# Altium PCB EFR32xG22_LC_REF_DES_A01.PcbDoc
Units mil, origin at the board's own origin, x right, y up, seen from the top; angles counter-clockwise.
Board outline 1341.79 x 1165.25 mil, 2 copper layers (Top Layer, Bottom Layer), stack 30.8 mil thick; 51 components, 41 nets, 152 pads, 622 vias.
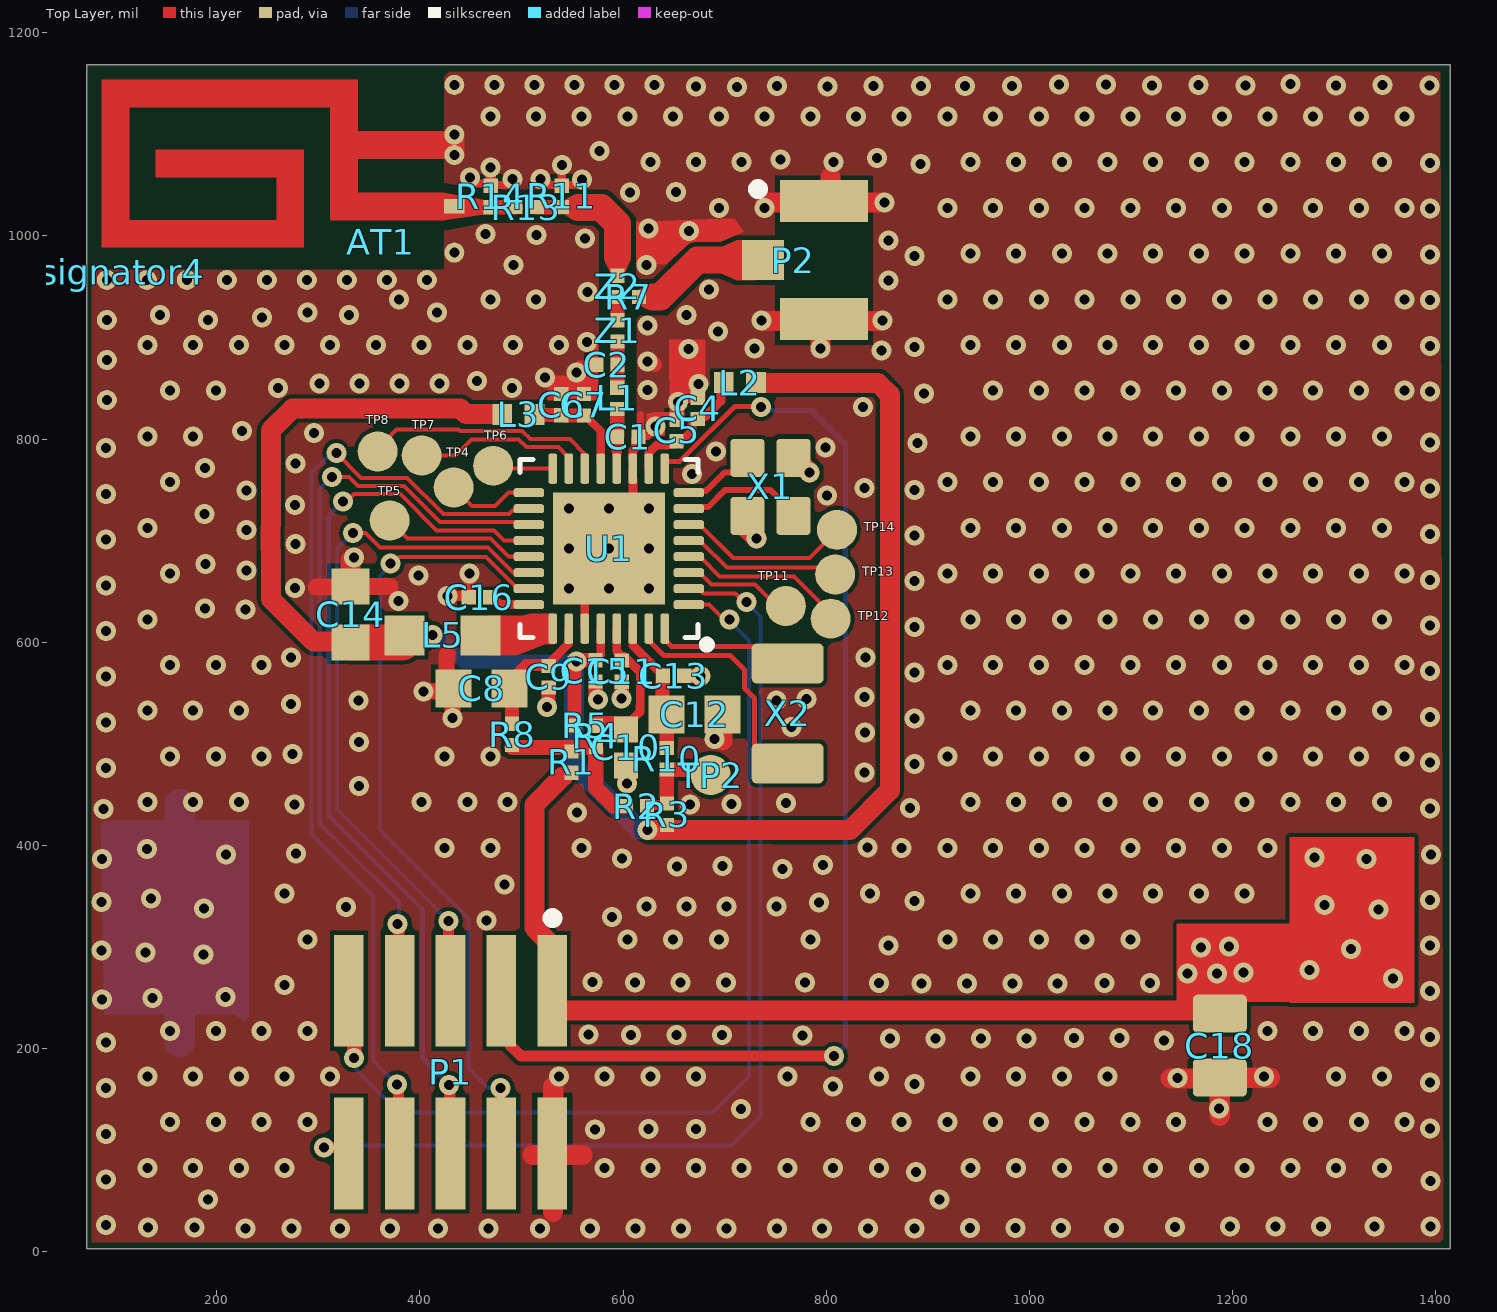
[diagram p0: Top Layer view]
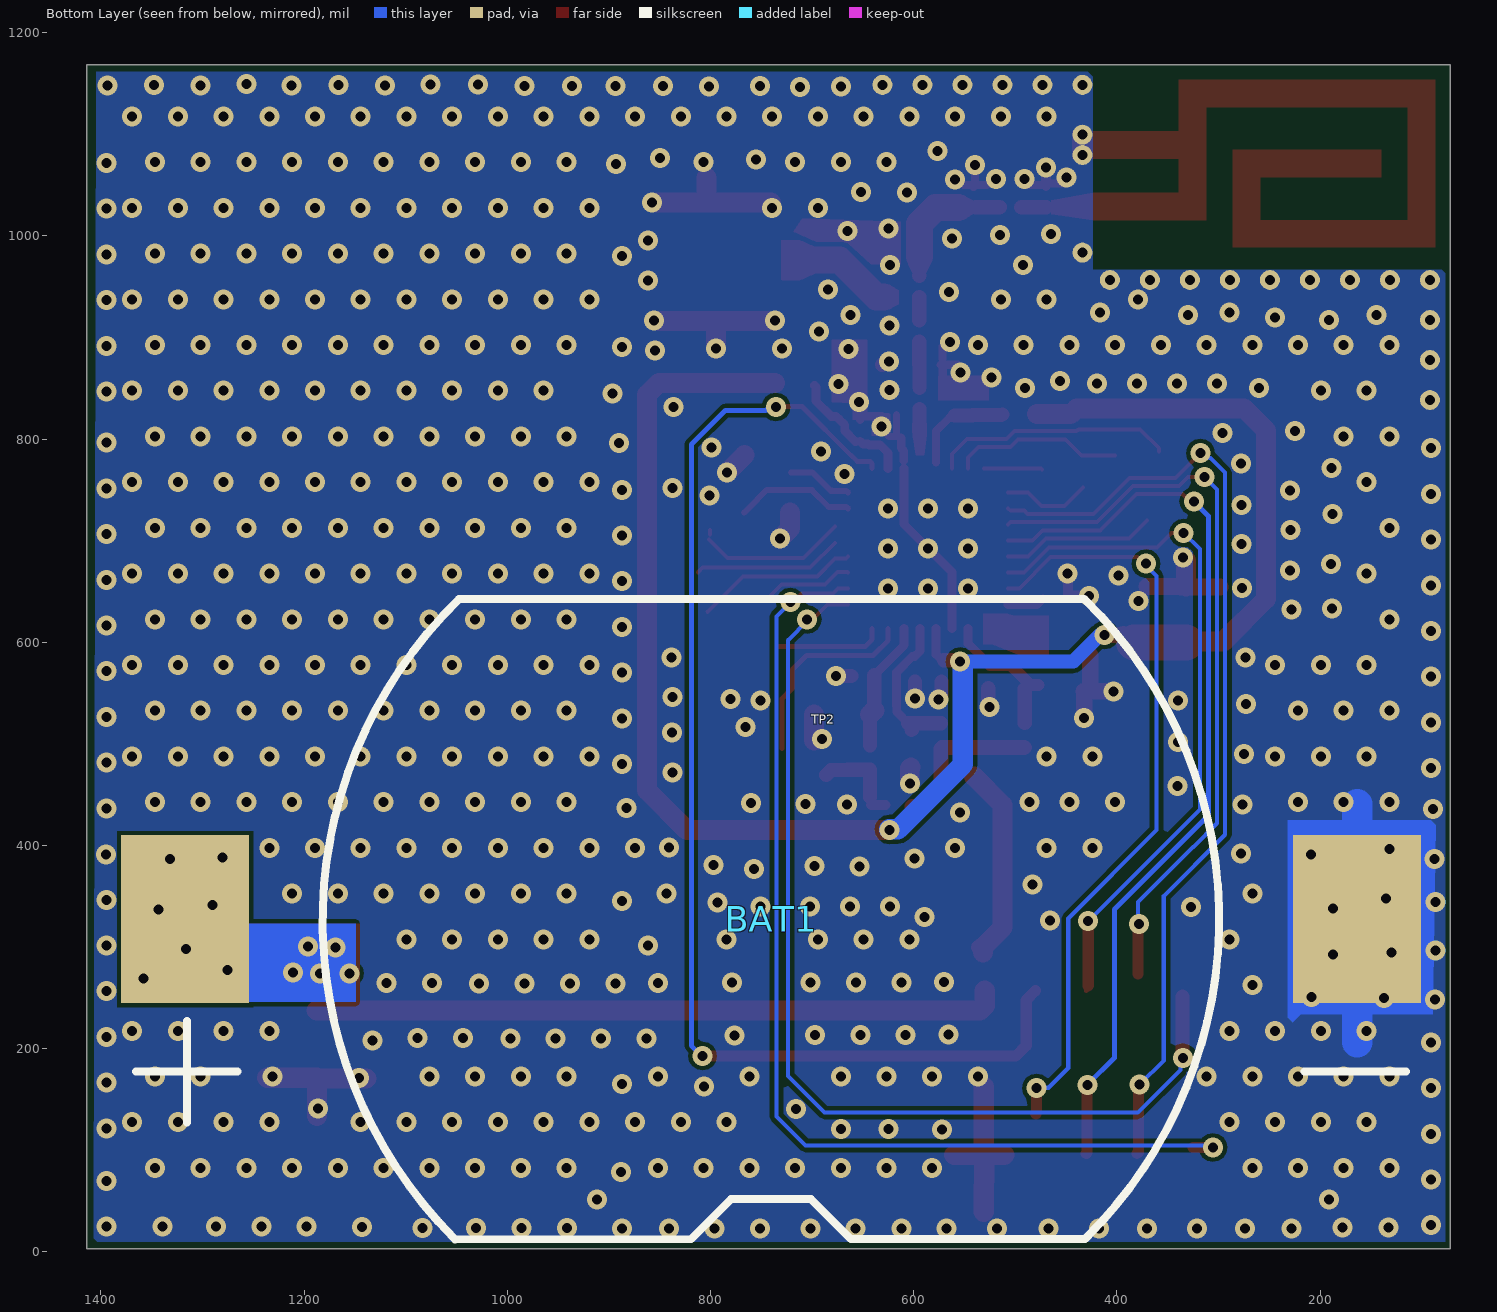
[diagram p1: Bottom Layer view, seen from below]

## Layer stack, top to bottom
Top Solder: solder mask 0.4, Solder Resist, Dk 3.5
Top Layer: signal copper 1.4
Dielectric 1: dielectric 28, FR-4, Dk 4.48
Bottom Layer: signal copper 1.4
Bottom Solder: solder mask 0.4, Solder Resist, Dk 3.5

## Board outline
72.21,3.22 1414,3.22 1414,1168.47 72.21,1168.47

## Design rules (kind name [scope] priority, off if disabled: settings)
AcuteAngle [All] p1: minimum=7.00000000000000E+0001 checktracksonly=FALSE
BoardOutlineClearance [All] p1: gap=0 ignorepadtopadclearanceinfootprint=FALSE
Clearance Clearance_to_Antenna [InComponent('AT1')] p1: gap=0 ignorepadtopadclearanceinfootprint=FALSE
Clearance Clearance_R3_R4 [InComponent('R3') vs InComponent('R4')] p2: gap=0 ignorepadtopadclearanceinfootprint=TRUE
Clearance Clearance_to_Holes [InPadClass('NPTH')] p3: gap=10 ignorepadtopadclearanceinfootprint=FALSE except(0: Arc-Hole Track-Hole SMDPad-Hole THPad-Hole Via-Hole Fill-Hole Poly-Hole Region-Hole Text-Hole)
Clearance Clearance_50Ohm [InNetClass('50Ohm') vs InNet('GND')] p4: gap=10 ignorepadtopadclearanceinfootprint=FALSE except(0: Arc-Hole Track-Hole SMDPad-Hole THPad-Hole Via-Hole Fill-Hole Poly-Hole Region-Hole Text-Hole; 5.91: Track-SMDPad; 7.87: SMDPad-SMDPad)
Clearance Clearance_1 [All] p5: gap=4 ignorepadtopadclearanceinfootprint=FALSE
Clearance Clerance_Polygon_GND [InNamedPolygon('GND1')] p6: gap=5 ignorepadtopadclearanceinfootprint=FALSE except(0: Arc-Hole Track-Hole SMDPad-Hole THPad-Hole Via-Hole Fill-Hole Poly-Hole Region-Hole Text-Hole)
ComponentClearance ComponentClearance_C2_C7 [InComponent('C2') vs InComponent('C7')] p1: gap=0 collisioncheckmode=3 verticalgap=10 showdistances=FALSE
ComponentClearance ComponentClearance_BAT [InComponent('Designator1')] p2: gap=0 collisioncheckmode=3 verticalgap=0 showdistances=FALSE
ComponentClearance ComponentClearance_1 [InComponent('PCB1')] p3: gap=0 collisioncheckmode=3 verticalgap=0 showdistances=FALSE
ComponentClearance ComponentClearance_AT1_R14 [InComponent('AT1') vs InComponent('R14')] p4: gap=0 collisioncheckmode=3 verticalgap=0 showdistances=FALSE
ComponentClearance ComponentClearance_C6_R7 [InComponent('C6') vs InComponent('R7')] p5: gap=0 collisioncheckmode=3 verticalgap=0 showdistances=FALSE
ComponentClearance ComponentClearance_TP [HasFootprint('TP') vs HasFootprint('TP')] p6: gap=0 collisioncheckmode=3 verticalgap=0 showdistances=FALSE
ComponentClearance ComponentClearance_AT1 [InComponent('AT1')] p7: gap=0 collisioncheckmode=3 verticalgap=0 showdistances=FALSE
ComponentClearance ComponentClearance_R2_R3 [InComponent('R2') vs InComponent('R3')] p8: gap=0 collisioncheckmode=3 verticalgap=0 showdistances=FALSE
ComponentClearance ComponentClearance_R6_R7 [InComponent('R6') vs InComponent('R7')] p9: gap=0 collisioncheckmode=3 verticalgap=0 showdistances=FALSE
ComponentClearance ComponentClearance_R4_R5 [InComponent('R4') vs InComponent('R5')] p10: gap=0 collisioncheckmode=3 verticalgap=0 showdistances=FALSE
ComponentClearance [All] p11: gap=10 collisioncheckmode=3 verticalgap=10 showdistances=FALSE
HoleToHoleClearance HoleToHoleClearance_ANT1toPAD [InComponent('AT1') vs ISpad] p1: gap=0 allowstackedmicrovias=TRUE
HoleToHoleClearance HoleToHoleClearance_R3toR4_1 [Incomponent ('R3') vs Incomponent ('R4')] p2: gap=0 allowstackedmicrovias=TRUE
HoleToHoleClearance HoleToHoleClearance_U1toVIA_1 [InComponent ('U1') vs IsVia] p3: gap=0 allowstackedmicrovias=TRUE
HoleToHoleClearance [All] p4: gap=10 allowstackedmicrovias=TRUE
MinimumSolderMaskSliver MinimumSolderMaskSliver_U1 [InComponent('U1') vs InComponent('U1')] p1: minsoldermaskwidth=0
MinimumSolderMaskSliver [All] p2: minsoldermaskwidth=4
PolygonConnect PolygonConnect_ANT_GND [(InNet('gnd') AND InComponent('AT1'))] p1: connectstyle=Direct reliefconductorwidth=10 reliefentries=4 polygonreliefangle="90 Angle" airgapwidth=10
PolygonConnect Polygon_VIA_Connect [IsVia] p2: connectstyle=Direct reliefconductorwidth=10 reliefentries=4 polygonreliefangle="90 Angle" airgapwidth=10
PolygonConnect [All] p3: connectstyle=NoConnect reliefconductorwidth=10 reliefentries=4 polygonreliefangle="90 Angle" airgapwidth=5
RoutingVias [All] p1: holewidth=9.84 width=19.68 viastyle="Through Hole" minholewidth=9.84 minwidth=19.68 maxholewidth=39.37 maxwidth=59.06
ShortCircuit ShortCircuit_ANTtoPAD [InComponent('AT1') vs InNet('GND')] p1: allowed=TRUE
ShortCircuit ShortCircuit_R3toR4_1 [InComponent('R3') vs InComponent('R4')] p2: allowed=TRUE
ShortCircuit [All] p3: allowed=FALSE
SilkToSilkClearance [All] p1: silktosilkclearance=4
SilkToSolderMaskClearance [IsPad] p1: minsilkscreentomaskgap=4 clearancetoexposedcopper=TRUE
SolderMaskExpansion [All] p1: expansion=0
Width 50ohm [InNet('50R*')] p1: maxlimit=114.47 minlimit=3.94 preferedwidth=114.47
Width [All] p2: maxlimit=39.37 minlimit=4 preferedwidth=4.92 minimp=50.000000 maximp=50.000000 favimp=50.000000
24 further rules are at their usual default settings.

## Classes and differential pairs
polygon class GND1: GND2 "Top Layer-No Net"
component class "03_ Connectors": TP4 TP5 TP6 TP11 TP12 X2
component class 02_RF,Antenna,andPower: C1 C5 C11 C12 C14 L1 L2 L3 L5 R1 R2 R3 R4 R5 R7 R10 TP2 U1 X1 Z1

## Components (designator, comment, footprint, x,y, rotation, side; value= is the part's Value field where it differs from the comment)
AT1 "SPIRAL_IFA" SPIRAL_IFA_INV 71.98,1168.64 r0 top
BAT1 "Comment" BU2032SM-BT-GTR 740.46,327.46 r180 bottom
C1 "1P0" 0201 594.21,802.32 r0 top
C2 "1P3" 0201 573.56,873.21 r0 top
C4 "120P" 0201 673.61,819.72 r90 top (schematic designator C5)
C5 "120P" 0201 652.71,798 r90 top
C6 "100n" 0201 539.21,823.47 r90 top (schematic designator C7)
C7 "120P" 0201 561.51,823.34 r90 top
C8 "1U" C_0603 488.45,554.78 r180 top (schematic designator C16)
C9 "100n" 0201 526.81,555.68 r90 top (schematic designator C7)
C10 "1" C_0402 602.93,478.89 r0 top (schematic designator R9)
C11 "10N" 0201 598.71,582.19 r270 top
C12 "1U" C_0603 643,529.04 r0 top
C13 "100n" 0201 660.32,567.05 r180 top (schematic designator C7)
C14 "4U7" C_0603 331.98,599.91 r90 top
C15 "100n" 0201 572.81,561.36 r90 top (schematic designator C7)
C16 "10N" 0201 469.23,644.42 r180 top (schematic designator C11)
C18 "Comment" C0805_L 1187.46,202.99 r90 top
Designator4 "Comment" Logo_LCRD 83.53,964.51 r0 top
L1 "2N6" 0201 594.31,829.65 r90 top
L2 "FB" 0402_Taiyo 715.16,855.67 r180 top
L3 "FB" 0402_Taiyo 496.76,824.36 r0 top
L5 "2U2" L_0603 459.75,606.76 r270 top
P1 "Comment" SMTC-FTSH-105-01-L-DV-K_V 430.24,177 r180 top
P2 "Comment" TECO-1909763-1_V 797.8,976.08 r270 top
R1 "0R" 0201 549.19,471.59 r90 top
R2 "0R" 0201 602.68,438.87 r0 top
R3 "0R" 0201 643.26,420.3 r90 top
R4 "0R" 0201 573.36,496.98 r90 top
R5 "0R" 0201 552.27,518.06 r0 top
R7 "0R" 0201 594.62,939.8 r0 top
R8 "0R" 0201 490.86,498.88 r90 top
R10 "0R" 0201 643,474.91 r90 top
R11 "0R" 0201 539.74,1028.4 r90 top (schematic designator R7)
R13 "0R" 0201 515.29,1028.4 r180 top (schematic designator R7)
R14 "0R" 0201 469.89,1028.3 r90 top (schematic designator R7)
TP2 "TP_SMD" TP#1 642.06,494.55 r90 bottom
TP4 "TP_SMD" TP#2 433.35,752.47 r180 top
TP5 "TP_SMD" TP#2 370.36,719.99 r180 top
TP6 "TP_SMD" TP#2 472.14,773.8 r180 top
TP7 "TP_SMD" TP#2 401.86,783.96 r90 top
TP8 "TP_SMD" TP#2 358.55,787.9 r90 top
TP11 "TP_SMD" TP#2 760.33,635.73 r90 top
TP12 "TP_SMD" TP#2 804.45,623.33 r90 top
TP13 "TP_SMD" TP#2 808.87,666.81 r90 top (schematic designator TP12)
TP14 "TP_SMD" TP#2 810.59,710.77 r90 top (schematic designator TP12)
U1 "EFR32xG22" EFR_QFN32 586.06,692.21 r180 top
X1 "38.4 MHz" HFXO_TZ2205E 767.77,724.46 r90 top
X2 "32.768 kHz" LFXO 762.09,530.03 r270 top
Z1 "18P" 0201 594.64,896.04 r90 top (schematic designator C3)
Z2 "0R" 0201 594.61,939.81 r90 top (schematic designator C3)

## Footprints (in the part's own frame and the unit in brackets; to place one, negate y for a bottom-side part, rotate by r counter-clockwise, add the part's x,y. Pads: shape width x height; smd on the part's side, far side on the other; paste and mask are expansions set on the pad)
0201 [mil]
  rect 14x14 smd: 1(0,0) 2(21,0)
  body extent 1,-5 21,5, height 10
0402_Taiyo [mm]
  rect 0.49x0.52 smd: 1(-0.4,0) 2(0.41,0)
  body extent -0.52,-0.28 0.53,0.28, height 0.55
BU2032SM-BT-GTR [mm] "CR2032 Battery Holder"
  rect 3.2x4.2 smd: 1(-14.65,0) 2(14.65,0)
  silkscreen extent -15.88,-8 15.88,8, body extent -11.31,-8.1 11.3,8.1, height 4.8
C0805_L [mm] "Capacitor, 0805"
  rrect25% 0.95x1.35 smd: 1(-0.8,0) 2(0.8,0)
  body extent -1.1,-0.72 1.1,0.72, height 1.45
C_0402 [mm]
  rect 0.6x0.65 smd: 1(0,0) 2(0,0.9)
  body extent -0.28,-0.05 0.28,0.97, height 1.02
C_0603 [mm]
  rect 0.9x0.95 smd: 1(0,0) 2(1.4,0)
  body extent -0.09,-0.39 1.51,0.39, height 0.89
EFR_QFN32 [mm]
  rect 2.8x2.8 smd: 0(0,0)
  rrect50% 0.76x0.22 smd: 1(-2,1.4) 2(-2,1) 3(-2,0.6) 4(-2,0.2) 5(-2,-0.2) 6(-2,-0.6) 7(-2,-1) 8(-2,-1.4) 17(2,-1.4) 18(2,-1) 19(2,-0.6) 20(2,-0.2) 21(2,0.2) 22(2,0.6) 23(2,1) 24(2,1.4)
  rrect50% 0.22x0.76 smd: 9(-1.4,-2) 10(-1,-2) 11(-0.6,-2) 12(-0.2,-2) 13(0.2,-2) 14(0.6,-2) 15(1,-2) 16(1.4,-2) 25(1.4,2) 26(1,2) 27(0.6,2) 28(0.2,2) 29(-0.2,2) 30(-0.6,2) 31(-1,2) 32(-1.4,2)
  silkscreen extent -2.53,-2.22 2.22,2.48, body extent -2.08,-2.07 2.07,2.08, height 1
HFXO_TZ2205E [mm]
  rrect20% 0.95x0.85 smd: 1(1.45,1.15) 2(1.45,0) 3(0,0) 4(0,1.15)
  body extent -0.37,-0.28 1.75,1.45, height 0.5
L_0603 [mm]
  rect 1x1 smd: 1(0,0) 2(0,-1.9)
  body extent -0.39,-1.74 0.39,-0.14, height 0.89
LFXO [mm]
  rrect25% 1x1.8 smd: 1(-1.25,0) 2(1.25,0)
  body extent -1.6,-0.75 1.6,0.75, height 0.95
Logo_LCRD [mil]
SMTC-FTSH-105-01-L-DV-K_V [mm] "CONN, 10-Leads, Body 6.35x3.43mm, Pitch 1.27mm"
  rect 0.74x2.79 smd: 1(-2.54,-2.035) 2(-2.54,2.035) 3(-1.27,-2.035) 4(-1.27,2.035) 5(0,-2.035) 6(0,2.035) 7(1.27,-2.035) 8(1.27,2.035) 9(2.54,-2.035) 10(2.54,2.035)
  silkscreen extent -2.68,-3.97 -2.43,-3.73, body extent -3.17,-2.92 3.18,2.92, height 6.12
SPIRAL_IFA_INV [mm]
  rect 0.508x0.356 smd: 1(9.195,-3.543)
  round 0.5 hole 0.25 mask+0.051: 2(0.508,-8.385) 2(0.508,-7.385) 2(0.508,-6.385) 2(0.508,-5.385) 2(1.508,-5.385) 2(2.508,-5.385) 2(3.509,-5.385) 2(4.509,-5.385) 2(5.509,-5.385) 2(6.509,-5.385) 2(7.509,-5.385) 2(8.51,-5.385) 2(9.195,-4.7) 2(9.195,-2.261) 2(9.195,-1.753) 2(9.195,-0.508) 2(10.195,-0.508) 2(11.195,-0.508) 2(12.195,-0.508) 2(13.196,-0.508) 2(14.196,-0.508)
  Top Layer region: 5.436,-3.886 1.067,-3.886 1.067,-4.572 5.436,-4.572
  Top Layer region: 4.75,-2.134 4.75,-4.572 5.436,-4.572 5.436,-2.134
  Top Layer region: 0.381,-0.381 0.381,-4.572 1.067,-4.572 1.067,-0.381
  Top Layer region: 5.436,-2.134 1.727,-2.134 1.727,-2.819 5.436,-2.819
  Top Layer region: 0.381,-1.067 6.782,-1.067 6.782,-0.381 0.381,-0.381
  Top Layer region: 6.096,-1.067 6.096,-3.886 6.782,-3.886 6.782,-1.067
  Top Layer region: 8.941,-3.2 6.782,-3.2 6.782,-3.886 8.941,-3.886
  Top Layer region: 9.449,-3.721 8.941,-3.721 8.941,-3.886
  Top Layer region: 9.449,-3.365 8.941,-3.365 8.941,-3.2
  Top Layer region: 7.861,-1.664 6.782,-1.664 6.782,-2.349 7.861,-2.349
  Top Layer region: 9.449,-1.664 8.941,-1.664 8.941,-2.349 9.449,-2.349
  Top Layer region: 8.941,-1.664 7.861,-1.664 7.861,-2.349 8.941,-2.349
  Multi-Layer pour cut-out: 0,0 8.941,0 8.941,-5.131 0,-5.131
TECO-1909763-1_V [mm] "SMD, 3-Leads, Body 2.6x2.6mm, Height 1.25mm"
  rect 1.05x2.2 smd: 1(-1.475,0) 3(1.475,0)
  rect 1x1.05 smd: 2(0,-1.525)
  silkscreen extent -1.9,-1.77 -1.65,-1.52, body extent -1.5,-1.55 1.5,1.55, height 1.23
TP#1 [mm]
  round 1 smd far side: 1(-0.64,1.123)
TP#2 [mm]
  round 1 smd: 1(0,0)

## Part data
C1 C2 C11 C16 Z1 Z2: library part C0201
C4 C5 C6 C7 C8 C9 C12 C13 C14 C15: library part C0402
C10: library part Res1, "Resistor", LatestRevisionDate=17-Jul-2002, LatestRevisionNote="Re-released for DXP Platform.", PackageDescription="Axial Device, Thru-Hole; 2 Leads; 0.3 in Pin Spacing", PackageReference=AXIAL-0.3, Published=8-Jun-2000, Publisher="Altium Limited"
L1: library part L0201
L2 L3 L5: library part L0402
R1 R2 R3 R4 R5 R7 R8 R10 R11 R13 R14: library part R0201, Price_1K=0.005
U1: library part EFR32xG22-2.4GHZ-QFN32, Mfg="Silicon Labs", Mfg #=<val>
X1: library part HFXO, Mfg=KDS, Mfg #=KDS_DSX211SH_2016, Price_1K=0.512
X2: library part LFXO, Mfg="Micro Crystal AG", Mfg #="CM8V-T1A, 32768Hz, 12.5pF, +/- 20ppm", Price_1K=0.3

## Via types
v1: diameter 19.68, hole 9.84, Top Layer to Bottom Layer, tented both sides, 622 vias

## Nets (pads, with @x,y where several pads share a name; then routed paths per layer and width w, separated by ;. In a path a pad name is that pad's centre, name@x,y a point inside that pad or via, vN(x,y) a via of type N, cw(c..) or ccw(c..) an arc to the next point about the centre after c; other vN are vias at no path point)
50R_ANT: R11.1 R13.1 Z2.2 | length 101
  Top Layer w14.02: R13.1 515.4,1028.29 R11.1@539.39,1028.29
  Top Layer w26.5: 556.28,1027.78 578.74,1027.78 594.51,1012.01 594.51,979.94
50R_IFA: AT1.1 R13.2 R14.1 | length 24.5
  Top Layer w14.02: R14.1 470,1028.19 R13.2@494.33,1028.19
50R_JUMP: R7.1 Z1.2 Z2.1 | length 22.8
  Top Layer w14.02: Z2.1 594.59,917.09 Z1.2
50R_UFL: P2.2 R7.2 | length 87.2
  Top Layer w14: 697.19,976.25 700.14,979.2
  Top Layer w26.5: 629.31,939.8 636.75,939.8 673.2,976.25 697.19,976.25
AVDD: C10.2 C11.1 R4.2 R5.2 U1.29 | length 142.2
  Top Layer w8.66: U1.29 593.94,591.21 599.02,586.13 601.23,586.13 616.88,570.48 616.88,537.26 616.78,537.16 616.78,531.51 C10.2@605.64,520.37
  Top Layer w14.02: R4.2@573.1,520.37 605.64,520.37 C10.2@605.78,520.5 ; C10.2@601.55,514.56 C10.2@602.18,513.93
EFR32_PA00: TP4.1 U1.17 | length 86.9
  Top Layer w4: TP4.1 451.55,734.27 474.12,734.27 487.39,747.55 U1.17@507.17,747.55
EFR32_PA01: P1.8 U1.18 | length 956.4
  Top Layer w4: v1(317.83,786.25) 342.27,761.81 387.59,761.81 423.13,726.27 487.87,726.27 491.16,729.57 504.94,729.57 U1.18@507.17,731.8
  Top Layer w11: v1(377.69,164.71) 378.97,163.43 378.97,98.16 P1.8
  Bottom Layer w4: v1(317.83,786.25) 313.59,786.25 308.91,781.58 308.1,781.58 293.51,766.99 293.51,410.62 353.95,350.18 353.95,188.45 v1(377.69,164.71) v1@378.8,163.61
EFR32_PA02: P1.7 U1.19 | length 739.9
  Top Layer w4: v1(313.71,762.56) 330.21,762.56 338.96,753.81 384.28,753.81 419.82,718.27 504.95,718.27 U1.19@507.17,716.05
  Top Layer w11: v1(378.15,323.01) 379.2,321.97 379.2,273.98 P1.7@379.37,273.81
  Bottom Layer w4: v1(313.71,762.56) 301.51,750.36 301.51,421.94 324.9,398.55 325.03,398.55 379.37,344.21 379.37,324.23 v1(378.15,323.01)
EFR32_PA03: P1.6 U1.20 | length 902.2
  Top Layer w4: v1(324.4,738.68) 328.3,738.68 335.43,745.81 380.97,745.81 416.51,710.27 473.08,710.27 483.05,700.3 U1.20@507.17,700.3
  Top Layer w11: v1(428.85,164.36) 429.55,163.66 429.55,97.58 P1.6
  Bottom Layer w4.92: v1(324.4,738.68) 309.97,724.25 309.97,429.74 402.48,337.24 402.48,191.1 v1@429.16,164.42
EFR32_PA04: TP5.1 U1.21 | length 151.5
  Top Layer w4: TP5.1 388.08,702.27 469.77,702.27 487.49,684.55 U1.21@507.17,684.55
EFR32_PA05: P1.5 U1.22 | length 736.6
  Top Layer w4: v1(334.35,707.61) 346.41,707.61 360.62,693.4 467.11,693.4 491.7,668.81 U1.22@507.17,668.81 ; P1.5@427.52,260.72 P1.5@428.68,261.88 ; P1.5@430.24,256.72 P1.5 P1.5@430.24,305.02
  Top Layer w11: v1(428.3,325.49) 428.3,262.26 P1.5@428.68,261.88
  Bottom Layer w4: v1(334.35,707.61) 318.43,691.69 318.43,435.36 426.67,327.12 v1@426.67,325.01
EFR32_PA06: P1.4 U1.23 | length 752.1
  Top Layer w4: v1(371.4,677.36) 373.45,677.36 379.93,683.84 465.35,683.84 496.14,653.06 U1.23@507.17,653.06 ; P1.4@479.4,135.73 P1.4@479.64,135.97
  Top Layer w11: v1(479.21,161.25) 479.21,137.12 480,136.33 P1.4@479.64,135.97
  Bottom Layer w4: v1(371.4,677.36) 371.4,675.57 361.03,665.2 361.03,415.16 447.97,328.22 447.97,180.97 467.34,161.6 v1@478.05,161.6
EFR32_PB00: TP6.1 U1.16 | length 57.5
  Top Layer w4: TP6.1@473.71,770.18 474.69,771.17 U1.16@530.79,771.17
EFR32_PB01: TP7.1 U1.15 | length 169.4
  Top Layer w4: TP7.1 434.93,783.96 450.73,799.76 497.28,799.76 504.91,792.13 536.41,792.13 546.54,781.99 U1.15@546.54,771.17
EFR32_PB02: TP8.1 U1.14 | length 238.9
  Top Layer w4: TP8.1 358.55,791.04 377.16,809.65 438.11,809.65 439.64,808.12 500.73,808.12 508.72,800.13 547.7,800.13 562.29,785.54 U1.14@562.29,771.17
EFR32_PC00: P1.9 U1.1 | length 993.4
  Top Layer w4: U1.1@664.65,637.31 684.79,637.31 699.56,622.55 v1@703.04,622.55
  Top Layer w14: v1@335.56,191.29 P1.9@335.56,251.4
  Bottom Layer w4: v1(335.09,191.1) 337.5,188.69 337.5,179.11 379.54,137.07 687.89,137.07 724.01,173.19 724.01,602.04 v1@704.15,621.9
  other v1: 704.87,622.56
EFR32_PC01: P1.10 U1.2 | length 1033
  Top Layer w4: U1.2@664.65,653.06 674.5,653.06 679.32,648.23 710.52,648.23 719.23,639.52 v1(721.42,639.52)
  Top Layer w11: v1(305.55,102.8) P1.10@325.02,102.8
  Bottom Layer w4: v1(305.55,102.8) 307.5,104.75 706.65,104.75 735.19,133.29 735.19,625.47 v1@723.38,637.28
EFR32_PC02: TP11.1 U1.3 | length 107.2
  Top Layer w4: U1.3@664.65,668.81 665.17,669.33 674.96,669.33 687.29,656.99 730.06,656.99 745.8,641.25 TP11.1@760.01,641.25
EFR32_PC03: TP12.1 U1.4 | length 161
  Top Layer w4.02: U1.4@664.65,684.55 666.88,682.33 677.71,682.33 695.03,665 768.13,665 TP12.1@803.05,630.08
EFR32_PC04: TP13.1 U1.5 | length 146.8
  Top Layer w4: U1.5@677.74,697.97 702.19,673.52 807.96,673.52 TP13.1@812.5,668.98
EFR32_PC05: TP14.1 U1.6 | length 149.3
  Top Layer w4: U1.6@677.45,714.08 708.52,683.01 783.38,683.01 TP14.1@801.65,701.28 ; TP14.1@800.76,706.14 TP14.1@800.76,710.77
EFR32_PD00: U1.32 X2.1 | length 105.2
  Top Layer w4.92: U1.32@641.03,613.69 641.03,602.86 647.92,595.97 X2.1@732.57,595.97
EFR32_PD01: U1.31 X2.2 | length 199.6
  Top Layer w4.92: U1.31@625.28,613.69 625.28,601.88 640.11,587.05 705.53,587.05 719.37,573.21 719.37,555.03 729.61,544.79 X2.2@729.61,495.58
EFR32_RESET: P1.3 U1.9 | length 1210.3
  Top Layer w4.92: U1.9 641.18,776.22 643.05,778.09 655.77,778.09 662.22,784.54 662.39,784.54 710.03,832.18 735.1,832.18 v1(735.71,831.57)
  Top Layer w11: P1.3 489.31,248.05 489.31,202.98 499.59,192.7 807.69,192.7 v1(807.82,192.83)
  Bottom Layer w4.92: v1(735.71,831.57) 738.53,828.75 745.42,828.75 745.97,828.2 785.56,828.2 819,794.75 819,203.08 v1@807.62,191.7
GND: AT1.2 BAT1.2 C1.2 C2.1 C4.2 C5.2 C6.2 C7.2 C8.2 C9.1 C10.1 C11.2 C12.2 C13.1 C14.2 C15.1 C16.2 C18.1 P1.2 P2.1 P2.3 R11.2 R14.2 U1.0 U1.11 U1.27 X1.2 X1.4 | length 1785.8
  Top Layer w4.92: 370.35,655.03 370.83,655.51 ; 431.09,591.31 433.33,589.07 ; C1.2@612.35,801.32 C1.2@614.26,803.23 ; C1.2@614.59,802.61 C1.2@614.67,802.53 ; 624.74,802.53 624.74,802.67 ; v1@630.16,813.33 631.07,812.42 v1(631.86,812.42) ; v1@1186.01,132.29 v1@1187.46,133.74 ; v1@1236.62,171.49 v1@1237.46,170.65
  Top Layer w7: C1.2@614.67,802.53 C1.2@615.42,802.53 ; C1.2 C1.2@615.42,802.53 ; 617.09,824.26 617.09,804.2 C1.2@615.42,802.53 ; 624.74,802.53 C1.2@615.42,802.53 ; 624.74,802.67 v1@628.98,806.91
  Top Layer w8: v1@451.84,1051.56 467.63,1051.56 R14.2 ; R14.2@473.44,1049.98 v1@493.15,1049.98 ; v1(518.9,1056.05) 522.06,1056.05 528.03,1050.08 539.4,1050.08 539.74,1049.74 v1@539.74,1069.09 ; R11.2@541.74,1049.64 541.74,1049.88 541.87,1050.01 550.94,1050.01 556.67,1055.74 v1(559.66,1055.74) ; v1@556.62,873.21 C2.1 571.52,871.17 571.52,859.23 ; C2.1@571.86,878.93 v1@571.86,891.07 ; 631.09,822.56 C5.2@655.03,822.56 ; C5.2@649.71,822 C5.2
  Top Layer w8.5: U1.11@609.71,778.83 609.71,788.47 612.35,791.11 C1.2@612.35,801.32
  Top Layer w8.66: U1.27@562.29,613.69 562.29,668.81 609.7,716.22 U1.11@609.7,760.3 ; U1.11@609.68,760.32 U1.11
  Top Layer w10: v1(427.46,645.79) 446.33,645.79 447.85,644.27 C16.2@447.98,644.4 ; v1@448.09,665.82 448.23,665.68 C16.2 ; R14.2 v1@469.89,1063.41 ; R11.2@541.38,1049.28 R11.2@541.74,1049.64
  Top Layer w14.02: v1@526.64,535.96 C9.1@526.64,554.88 ; C15.1 572.81,548 575.63,545.18 v1(575.63,543.65) ; v1(598.71,544.79) C11.2 ; v1(624.27,876.19) 628.31,876.19 v1@631.23,873.27 ; C13.1@661.19,566.74 v1@677.86,566.74
  Top Layer w16: v1(403.54,551.42) 406.39,551.42 405.93,551.88 432.94,551.88 432.25,551.19 v1(432.25,525.34) ; C8.2@426.27,561.39 426.27,587.24
  Top Layer w17: 298.58,654.39 C14.2@336.95,654.39 ; C14.2 370.35,655.03
  Top Layer w19: C10.1@602.74,477.18 603.96,475.96 v1(603.96,461.25)
  Top Layer w19.68: C14.2 331.98,680.59 v1(335,683.61) ; v1@698.12,503.45 C12.2 ; X1.4@721.74,727.86 721.74,712.11 v1(731.58,702.27) ; v1@737.49,916.31 P2.3@795.56,916.31 ; v1@740.44,1032.98 P2.1@804.01,1032.98 ; X1.2@766.52,784.46 v1(783.75,767.23) ; v1(794.57,889.28) 794.57,915.33 P2.3@795.56,916.31 ; 804.01,1057.59 P2.1@804.01,1032.98 ; v1@850.68,916.31 P2.3@795.56,916.31 ; v1@853.63,1032.98 P2.1@804.01,1032.98
  Top Layer w20: 511.04,95.48 530.24,95.47 P1.2@531.26,95.47 ; 531.01,39.6 530.76,95.47 P1.2@531.26,95.47 ; 531.26,162.55 P1.2@531.26,95.47 ; 560.22,95.48 P1.2@531.26,95.47 ; v1@1138.82,170.68 C18.1@1187.46,170.68 ; v1@1187.46,133.74 C18.1@1187.46,170.68 ; C18.1@1187.98,170.68 C18.1@1187.46,170.68 ; v1@1236.62,171.49 C18.1 C18.1@1187.46,170.68
  Bottom Layer w4.92: BAT1.2@116.51,296.7 BAT1.2@117.15,297.34 ; BAT1.2@146.8,344.35 BAT1.2 ; 163.69,206.6 164.02,206.27 ; 163.69,440.58 164.91,441.8
  Bottom Layer w20: v1(86.61,344.35) BAT1.2@146.8,344.35 ; v1(86.74,296.7) BAT1.2@116.51,296.7
  Bottom Layer w30: 163.69,206.6 BAT1.2 163.69,440.58
  other v1: 228.45,23 273.89,23 321.32,23 370.43,23 417.94,23 467.46,23 518.16,23 567.69,23 612.33,23 657.19,23 701.83,23 751.41,23 796.05,23 840.91,23 887.05,23 132.71,24.26 178.15,24.26 941.49,23.58 986.13,23.58 1030.99,23.58 1083.41,23.72 1143.06,24.46 1197.5,25.04 1242.14,25.04 1287,25.04 1339.42,25.18 1394.79,24.97 91.01,26.29 191.38,51.74 911.7,51.71 1394.79,69.81 91.01,71.13 888.22,78.86 131.84,82.67 176.84,82.67 221.84,82.67 266.84,82.67 581.84,82.67 626.84,82.67 671.84,82.67 716.84,82.67 761.84,82.67 806.84,82.67 851.84,82.67 941.84,82.67 986.84,82.67 1031.84,82.67 1076.84,82.67 1121.84,82.67 1166.84,82.67 1211.84,82.67 1256.84,82.67 1301.84,82.67 1346.84,82.67 91.01,116.13 572.35,120.59 625.04,121.23 671.86,121.23 1394.43,121.58 154.34,127.67 199.34,127.67 244.34,127.67 289.34,127.67 784.34,127.67 829.34,127.67 874.34,127.67 919.34,127.67 964.34,127.67 1009.34,127.67 1054.34,127.67 1099.34,127.67 1144.34,127.67 1234.34,127.67 1279.34,127.67 1324.34,127.67 1369.34,127.67 716.05,140.46 1186.53,141.33 91.01,161.13 806.47,162.59 887.05,165.17 1394.43,166.58 1145.9,171.17 131.84,172.67 176.84,172.67 221.84,172.67 266.84,172.67 311.84,172.67 536.84,172.67 581.84,172.67 626.84,172.67 671.84,172.67 761.84,172.67 851.84,172.67 941.84,172.67 986.84,172.67 1031.84,172.67 1076.84,172.67 1231.09,172.7 1301.84,172.67 1346.84,172.67 91.01,206.13 1132.69,208.2 863,209.99 907.64,209.99 952.5,209.99 997.14,209.99 1043.82,210.4 1088.46,210.4 1394.43,211.58 607.95,213.29 652.59,213.29 697.45,213.29 776.45,213.18 566.01,213.8 154.34,217.67 199.34,217.67 244.34,217.67 289.34,217.67 1234.34,217.67 1279.34,217.67 1324.34,217.67 1369.34,217.67 87.02,248.24 137,249.72 208.76,251.15 1394.43,256.58 266.84,262.67 612.04,265.22 656.68,265.22 701.54,265.22 779.17,265.22 851.79,264.85 893.73,264.34 938.37,264.34 983.23,264.34 1027.87,264.34 1074.15,264.75 1118.79,264.75 570.1,265.73 187.31,292.6 129.84,294.89 861.54,301.62 1394.43,301.58 289.34,307.67 604.34,307.67 649.34,307.67 694.34,307.67 784.34,307.67 919.34,307.67 964.34,307.67 1009.34,307.67 1054.34,307.67 1099.34,307.67 465.89,325.98 589.32,329.69 187.6,337.78 327.4,339.32 623.35,340 662.72,340 702.1,340 751.03,340 793.08,343.75 887.05,345.17 1394.43,346.58 135.28,347.79 266.84,352.67 843.22,352.74 941.84,352.67 986.84,352.67 1031.84,352.67 1076.84,352.67 1121.84,352.67 1166.84,352.67 1211.84,352.67 483.4,361.73 757.03,376.67 653.2,379.54 697.8,379.64 797.03,380.64 87.29,386.55 599.21,387.04 209.1,391.27 278.03,392.19 1395.09,391.34 131.56,396.39 424.34,397.67 469.34,397.67 559.34,397.67 840.83,398.14 874.34,397.67 919.34,397.67 964.34,397.67 1009.34,397.67 1054.34,397.67 1099.34,397.67 1144.34,397.67 1189.34,397.67 1234.34,397.67 554.57,432.53 88.73,436.04 882.53,437.18 1394.43,436.58 276.71,440.51 665.88,440.46 706.59,441.11 760.34,441.93 131.84,442.67 176.84,442.67 221.84,442.67 401.84,442.67 446.84,442.67 486.19,442.79 941.84,442.67 986.84,442.67 1031.84,442.67 1076.84,442.67 1121.84,442.67 1166.84,442.67 1211.84,442.67 1256.84,442.67 1301.84,442.67 1346.84,442.67 340.37,458.7 837.51,472.03 91.01,476.13 887.05,480.17 1394.43,481.58 154.34,487.67 199.34,487.67 244.34,487.67 424.34,487.67 469.34,487.67 919.34,487.67 964.34,487.67 1009.34,487.67 1054.34,487.67 1099.34,487.67 1144.34,487.67 1189.34,487.67 1234.34,487.67 1279.34,487.67 1324.34,487.67 1369.34,487.67 274.75,490.25 340.09,501.89 690.13,504.69 837.96,511.1 765.62,516.85 91.01,521.13 887.05,525.17 1394.43,526.58 131.84,532.67 176.84,532.67 221.84,532.67 941.84,532.67 986.84,532.67 1031.84,532.67 1076.84,532.67 1121.84,532.67 1166.84,532.67 1211.84,532.67 1256.84,532.67 1301.84,532.67 1346.84,532.67 525.39,536.28 273.23,539.2 339.8,542.52 751.03,542.82 780.6,544.14 837.51,546.09 91.01,566.13 676.52,567.05 887.05,570.17 1394.43,571.58 154.34,577.67 199.34,577.67 244.34,577.67 919.34,577.67 964.34,577.67 1009.34,577.67 1054.34,577.67 1099.34,577.67 1144.34,577.67 1189.34,577.67 1234.34,577.67 1279.34,577.67 1324.34,577.67 1369.34,577.67 273.35,585.25 838.63,585.15 91.01,611.13 887.05,615.17 1394.43,616.58 131.84,622.67 941.84,622.67 986.84,622.67 1031.84,622.67 1076.84,622.67 1121.84,622.67 1166.84,622.67 1211.84,622.67 1256.84,622.67 1301.84,622.67 1346.84,622.67 228.32,632.15 188.54,633.2 378.88,640.89 546.69,652.84 586.06,652.84 625.43,652.84 277,653.52 91.01,656.13 887.05,660.17 1394.43,661.58 398.64,665.8 154.34,667.67 448.94,667.56 919.34,667.67 964.34,667.67 1009.34,667.67 1054.34,667.67 1099.34,667.67 1144.34,667.67 1189.34,667.67 1234.34,667.67 1279.34,667.67 1324.34,667.67 1369.34,667.67 229.61,670.76 189.22,677.2 546.69,692.21 586.06,692.21 625.43,692.21 277.63,696.66 91.01,701.13 887.05,705.17 1394.43,706.58 229.21,710.41 131.84,712.67 941.84,712.67 986.84,712.67 1031.84,712.67 1076.84,712.67 1121.84,712.67 1166.84,712.67 1211.84,712.67 1256.84,712.67 1301.84,712.67 1346.84,712.67 187.85,726.45 546.69,731.58 586.06,731.58 625.43,731.58 277.4,735.08 801.01,744.67 91.01,746.13 229.61,749.51 887.05,750.17 837.72,752.03 1394.43,751.58 154.34,757.67 919.34,757.67 964.34,757.67 1009.34,757.67 1054.34,757.67 1099.34,757.67 1144.34,757.67 1189.34,757.67 1234.34,757.67 1279.34,757.67 1324.34,757.67 1369.34,757.67 668.1,765.72 188.67,771.6 277.86,776.02 691.42,787.79 91.01,791.13 799.13,791.57 889.91,796.4 1394.43,796.58 131.84,802.67 176.84,802.67 941.84,802.67 986.84,802.67 1031.84,802.67 1076.84,802.67 1121.84,802.67 1166.84,802.67 1211.84,802.67 1256.84,802.67 1301.84,802.67 1346.84,802.67 296.07,805.89 224.83,807.88 836.3,831.57 653.95,836.62 896.39,844.86 1394.43,846.85 154.34,847.67 199.34,847.67 964.34,847.67 1009.34,847.67 1054.34,847.67 1099.34,847.67 1144.34,847.67 1189.34,847.67 1234.34,847.67 1279.34,847.67 1324.34,847.67 1369.34,847.67 623.88,848.44 260.41,850.19 490.65,850.54 301.44,854.83 340.82,854.83 380.2,854.83 419.57,854.83 674.2,854.49 456.34,857.15 523.36,860.68 554.2,865.71 854.58,887.28 664.3,888.77 729.61,889.28 887.05,890.44 1394.43,891.85 131.84,892.67 176.84,892.67 221.84,892.67 266.84,892.67 311.84,892.67 356.84,892.67 401.84,892.67 446.84,892.67 491.84,892.67 536.84,892.67 941.84,892.67 986.84,892.67 1031.84,892.67 1076.84,892.67 1121.84,892.67 1166.84,892.67 1211.84,892.67 1256.84,892.67 1301.84,892.67 1346.84,892.67 564.41,895.78 693.42,905.83 624.06,911.81 191.32,917.21 736.5,916.84 855.6,916.84 244.49,919.63 330.31,922.23 662.3,922.15 144.35,922.32 289.48,924.75 416.95,924.64 1394.43,936.85 379.34,937.67 469.34,937.67 514.34,937.67 919.34,937.67 964.34,937.67 1009.34,937.67 1054.34,937.67 1099.34,937.67 1144.34,937.67 1189.34,937.67 1234.34,937.67 1279.34,937.67 1324.34,937.67 1369.34,937.67 565.24,944.87 684.67,947.51 861.5,956.21 623.29,971.27 492.34,971.5 887.05,980.44 1394.43,981.85 941.84,982.67 986.84,982.67 1031.84,982.67 1076.84,982.67 1121.84,982.67 1166.84,982.67 1211.84,982.67 1256.84,982.67 1301.84,982.67 1346.84,982.67 861.5,995.59 562.56,997.7 514.93,1001.16 464.78,1001.72 665.18,1005 625.06,1007.43 1394.43,1026.85 694.34,1027.67 739.34,1027.67 919.34,1027.67 964.34,1027.67 1009.34,1027.67 1054.34,1027.67 1099.34,1027.67 1144.34,1027.67 1189.34,1027.67 1234.34,1027.67 1279.34,1027.67 1324.34,1027.67 1369.34,1027.67 857.57,1032.98 606.76,1042.7 652.16,1043.32 491.12,1055.97 449.58,1057.41 469.72,1067.2 539.93,1069.89 893.02,1070.95 1394.43,1071.85 626.84,1072.67 671.84,1072.67 716.84,1072.67 807.2,1072.99 941.84,1072.67 986.84,1072.67 1031.84,1072.67 1076.84,1072.67 1121.84,1072.67 1166.84,1072.67 1211.84,1072.67 1256.84,1072.67 1301.84,1072.67 1346.84,1072.67 755.18,1075.4 849.92,1076.89 576.77,1083.59 469.34,1117.67 514.34,1117.67 559.34,1117.67 604.34,1117.67 649.34,1117.67 694.34,1117.67 739.34,1117.67 784.34,1117.67 829.34,1117.67 874.34,1117.67 919.34,1117.67 964.34,1117.67 1009.34,1117.67 1054.34,1117.67 1099.34,1117.67 1144.34,1117.67 1189.34,1117.67 1234.34,1117.67 1279.34,1117.67 1324.34,1117.67 1369.34,1117.67 671.79,1147.07 712.06,1146.81 801.36,1147.16 751.52,1147.43 846.74,1147.42 893.35,1147.42 936.41,1147.78 983.02,1147.78 1120.58,1147.9 1212.52,1147.83 1301.87,1148.1 1393.81,1148.03 1028.98,1149.24 1075.59,1149.24 1166.32,1148.59 1347.61,1148.79 1256.88,1149.44
IOVDD: R2.2 R3.2 R10.1 TP2.1 | length 89.7
  Top Layer w4.92: R2.2@627.11,439.12 R2.2@627.89,439.9 ; R3.2@641.86,439.9 R3.2
  Top Layer w10: R2.2@627.89,439.9 R3.2@641.86,439.9
  Top Layer w14.02: R3.2@643,447.81 R10.1 643.4,474.51 665.38,474.51 665.67,474.22 681.42,474.22 TP2.1
NetC1_1: C1.1 L1.1 U1.12 | length 26.9
  Top Layer w14.02: C1.1@594.33,802.73 L1.1
NetC2_1: C2.2 L1.2 Z1.1 | length 45.5
  Top Layer w4.92: C2.2@594.1,873.15 C2.2@594.75,872.5
  Top Layer w14: L1.2 594.37,850.71 594.37,873.05 C2.2@594.59,873.27 ; C2.2@594.61,873.29 Z1.1@594.61,894.96
  Top Layer w14.02: Z1.1 Z1.1@594.74,895.94
NetC4_1: C4.1 C5.1 L2.2 U1.10 | length 118.3
  Top Layer w8.66: U1.10@625.43,771.17 625.43,786.49 633.19,794.25 643.74,794.25 644.82,795.33 650.04,795.33 C5.1 ; C5.1@657.47,797.71 668.04,808.28 668.04,814.15 C4.1 ; C4.1@676.28,822.39 681.22,822.39 696.35,837.52 696.35,851.36 L2.2@697.83,852.84
NetC6_1: C6.1 C7.1 L3.2 U1.13 | length 103.7
  Top Layer w8: C7.1@561.39,824.74 561.39,822.63 563.04,820.99 565.14,820.99 578.07,808.06 U1.13@578.07,776.96
  Top Layer w14.02: L3.2 513.62,823.64 542.01,823.64 542.15,823.78 542.75,823.18 C7.1@560.04,823.18
NetC8_1: C8.1 C9.2 R8.2 U1.26 | length 134.5
  Top Layer w8.66: C9.2@525.19,577.46 536.18,588.45 536.18,588.54 546.54,598.9 U1.26@546.54,613.69
  Top Layer w11.81: C8.1@477.41,557.77 484.99,557.77 504.68,577.46 C9.2@525.19,577.46
  Top Layer w14: R8.2@490.79,520.52 C8.1@490.79,554.01
NetC10_1: 
NetC12_1: C12.1 C13.2 R10.2 U1.30 | length 130.2
  Top Layer w8.66: U1.30@609.53,613.69 609.53,597.15 C13.2@639,567.68
  Top Layer w14.02: C12.1@639,532 639,533.04 C13.2@639,567.68 ; R10.2@643,498.53 C12.1
  Top Layer w19.68: C12.1@638.91,533.13 639,533.04 C12.1
NetC16_1: C16.1 U1.24 | length 36.4
  Top Layer w8.66: C16.1@473.03,642.88 478.6,637.31 U1.24@507.17,637.31
NetL4_2: 
NetL5_1: L5.1 U1.25
NetU1_7: U1.7 X1.3 | length 119.4
  Top Layer w5.91: U1.7@664.65,731.8 666.03,733.18 683.75,733.18 700.3,749.73 704.46,749.73 704.84,750.11 744.76,750.11 754.23,740.64 754.23,740.18 766.55,727.86 X1.3@767.01,727.86
NetU1_8: U1.8 X1.1 | length 65.7
  Top Layer w5.91: U1.8@664.65,747.55 666.03,748.92 681.55,748.92 681.85,749.22 ; 680.54,749.22 681.85,749.22 ; X1.1@720.87,767.35 699.98,767.35 681.85,749.22
VDCDC: C14.1 C15.2 L2.1 L3.1 L5.2 R3.1 R5.1 U1.28 | length 1823.7
  Top Layer w8.66: C15.2@573.21,583.21 578.04,588.04 U1.28@578.04,613.69
  Top Layer w14.02: L5.2@376.7,594.45 L5.2@378.35,596.1 ; R5.1@552.37,523.26 552.37,535.48 552.23,535.62 552.23,580.06 v1@554.25,582.08 ; v1(554.35,581.01) 555.71,582.37 C15.2@570.16,582.37 ; R3.1@647.64,415.12 R3.1@647.77,415.26
  Top Layer w16: L5.2@376.7,594.45 378.56,592.59 393.84,607.87 394.54,607.17 v1(412.27,607.17)
  Top Layer w19.68: 253.18,692.84 253.18,712.46 ; 253.3,690.52 253.3,642.69 295.37,600.62 C14.1@328.22,600.62 ; 253.3,715.24 253.3,808.66 274.86,830.22 439.94,830.22 445.61,824.56 L3.1@478.64,824.56 ; R3.1@647.64,415.12 722.47,415.12 ; 722.51,415.16 747.81,415.16 ; L2.1@736.38,855.25 851.02,855.25 862.55,843.72 862.55,454.3 823.37,415.12 747.85,415.12
  Top Layer w20: v1@624.7,415.26 R3.1@647.77,415.26
  Top Layer w35.43: C14.1 L5.2@383.16,599.91
  Bottom Layer w14.02: v1(412.27,607.17) 416.87,607.17 443.03,581.01 v1(554.35,581.01) v1@552.23,578.89
  Bottom Layer w20: v1@552.23,578.89 551.79,578.45 551.79,479.7 615.52,415.97 v1@624.13,415.97
  other v1: 624.13,415.51
VIN: R1.2 R2.1 R4.1 R8.1 | length 155.5
  Top Layer w15: R8.1@491.01,496.44 R4.1@572.27,496.44 ; R4.1@573.27,495.19 573.27,456.73 591.49,438.51 R2.1@601.5,438.51
VMCU: BAT1.1 C18.2 P1.1 R1.1 | length 884.4
  Top Layer w4.92: 537.97,465.05 539.97,467.05 544.65,467.05 R1.1 ; 873.84,239.77 875.94,237.67
  Top Layer w15: P1.1@536.05,299.63 P1.1@536.39,299.97
  Top Layer w19.68: P1.1@531.86,294.77 531.86,299.96 512.66,319.16 512.66,439.93 540.79,468.06
  Top Layer w20: P1.1 530.24,242.24 534.81,237.67 875.94,237.67 C18.2@1187.58,237.67
  other v1: 1358.06,269.14 1155.6,274.07 1184.48,274.09 1210.86,275.11 1275.7,277.34 1316.32,298.21 1169.11,299.41 1196.32,300.66 1343.53,336.87 1290.24,341.34 1331.98,386.81 1280.55,388.3

## Polygon pours and split planes (outlines as drawn)
GND on Top Layer "GND1" (solid, pour order 7): 1414,1168.47 1414,3.22 72.21,3.22 72.21,1168.47
no net on Top Layer "Top Layer-No Net" (solid, pour order 6): 232.57,1119.59
GND on Bottom Layer "GND2" (solid, pour order 8): 1409.86,1168.47 1409.86,10.05 72.21,10.05 72.21,1168.47

## Other copper
Top Layer:
  pour cut-out: 457.65,1045.97 423.7,1052.17 423.7,1005.25 462.27,1012.56 568.15,1012.56 575.91,1004.8 575.91,745.79 486.32,745.79 486.59,592.24 620.99,592.24 620.99,464.05 648.99,464.05 648.99,506.66 683.44,506.66 683.44,592.24 683.44,596.18 683.44,701.5 712.18,701.49 725.92,687.75 737.61,687.75 751.45,701.59 753.32,701.5 788.01,701.49 788.01,749.84 797.62,759.44 797.62,773.61 788.01,783.22 788.01,798.72 784.33,802.4 705.48,802.4 702.83,799.75 702.18,745.79 613.56,745.79 613.56,921.47 644.21,921.47 680.65,957.91 695.8,958.06 709.82,951.37 845.55,951.37 845.55,1000.78 693.15,1000.78 662.47,991.41 629.13,958.07 612.86,957.79 612.86,1017.63 610.81,1021.56 588.8,1043.57 583.13,1045.97
  region net 50R_UFL: 614.77,946.76 621.04,950.33 623.65,951.83 623.65,927.87 618.18,930.99 614.71,932.83
  region net 50R_ANT: 541.95,1035.29 546.3,1037.37 550.92,1039.91 550.92,1015.66 541.95,1021.48
  region net 50R_ANT: 587.75,963.38 601.61,963.38 607.35,976.72 581.76,976.72
  pour cut-out: 749.48,1010.83 750.37,1011.3 846.11,1011.3 846.11,939.25 749.48,939.25
  region net VMCU: 1256.3,408.05 1378.94,408.05 1378.94,245.2 1259.18,245.2 1256.3,245.2
  region net GND: 612.86,1013.97 612.86,972.28 642.5,972.28 665.1,992.77 669.81,994.47 696.44,994.47 718.81,1004.12 709.55,1017.34
  region net GND: 623.38,825.07 623.99,825.68 640.5,825.68 641.26,803.55 638.78,803.55 623.38,803.55
  region net GND: 526.02,862.44 575.84,862.44 575.84,838.33 526.02,838.33
  pour cut-out: 308.17,581.06 308.17,677 361.24,677 361.24,581.06
  region net VMCU: 1145.19,323.07 1304.23,323.07 1304.23,246.32 1148.07,246.32 1145.19,246.32
  region net 50R_IFA: 423.7,1042.53 464.82,1035.24 464.82,1021.33 423.7,1015.61
  region: 628.74,973.68
  region: 616.02,968.33
  region: 1021.65,19.55
  region net GND: 645.66,898.01 680.88,898.01 680.88,836.32 660.19,835.51 660.19,818.88 645.96,818.88
  region net 50R_UFL: 711.96,995.75 730.5,995.75 730.5,956.83 730.06,956.38 711.96,956.38 666.97,976.07
  region: 714.85,982.78
  region net NetC1_1: 589.6,783.98 587.32,803.21 587.32,815.4 601.32,815.4 601.32,807.35 598.26,783.98
  pour cut-out: 586.61,529.25 586.61,467.43 615.41,467.43 615.41,529.25
  pour cut-out: 416.41,531.07 416.41,574.78 505.69,574.78 505.69,531.07
  pour cut-out: 329.02,430.59
  pour cut-out: 329.02,430.59
  region net NetL5_1: 531.57,628.24 507.75,628.24 500.79,626.24 467.26,626.24 467.26,587.37 495.54,587.37 523.5,598.32 531.57,598.32
  pour cut-out: -4435.35,-1034.1
  text ".Layer_Name" at 3029.97,-2954.97 h60
Bottom Layer:
  region net GND: 86.19,420.21 90.96,424.98 231.77,424.98 231.77,230.88 227,226.11 219.05,234.06 89.37,234.06
  pour cut-out: 358.8,310.66 353.53,310.28 451.82,310.28 451.82,147.21 358.8,151.28
  region net VMCU: 1149.47,322.96 1230.03,322.96 1269.22,322.96 1269.22,246.16 1149.47,246.16
  region: 477.64,404.31
  region: 422.33,412.31
  text ".Layer_Name" at 3043.36,-2952.91 h60
Multi-Layer:
  pour cut-out: 72.21,1168.47 76.92,1164.93 77.04,9.4 1407.24,9.4 1404.52,1161.38 424.17,1161.38 424.17,1168.47 1414,1168.47 1414,3.22 72.21,3.22

## Silkscreen, mask and mechanical layers (free items; w line width, h text height)
Top Overlay:
  text ".Layer_Name" at 3030.47,-2954.03 h60
Bottom Overlay:
  text ".Layer_Name" at 3034.09,-2951.89 h60
Top Paste:
  text ".Layer_Name" at 3034.09,-2962.18 h60
Bottom Paste:
  text ".Layer_Name" at 3039.24,-2963.21 h60
Top Solder:
  text ".Layer_Name" at 3033.06,-2956 h60
Bottom Solder:
  text ".Layer_Name" at 3040.27,-2962.18 h60
Drill Guide:
  text ".Layer_Name" at 3035.69,-2962.96 h60
Top M1 Top Assembly/M2 Bottom Assembly:
  text ".Layer_Name" at 2626.78,-2969.59 h60
M7 Board Outline:
  lines w1.97: 1413.43,1168.53 130.34,1168.53 ; 1413.51,1168.29 1413.51,3.15 72.4,3.15 72.4,331.92 72.25,332.07 72.25,479.9 72.25,823.3 72.32,823.37 72.32,993 72.21,993.12 72.21,1042.19 ; 72.22,1042.2 72.22,1168.5 130.34,1168.5 ; 72.21,1042.19 72.22,1042.2 ; 130.34,1168.5 130.34,1168.53
Top M13 Top 3D/M12 Bottom 3D:
  text ".Layer_Name" at 2875.69,-2959.08 h60
M16 Sheet Border:
  drawing of 3172 lines, arcs and shapes, not listed
  text "1" at -2512.13,4099.97 h70
  text "2" at -154.12,4099.97 h70
  text "3" at 2222.53,4099.97 h70
  text "4" at 4597.88,4099.97 h70
  text "A" at 5685.53,3209.97 h70
  text "B" at 5685.53,1333.97 h70
  text "C" at -3609.47,-542.03 h70
  text "C" at 5685.53,-542.03 h70
  text "TITLE:" at 2665.53,-1965.03 h45
  text ".Title" at 2665.53,-2085.03 h70
  text "FILE NAME:" at 2665.53,-2265.03 h45
  text ".Pcb_File_Name_No_Path" at 2665.53,-2385.03 h70
  text "D" at -3609.47,-2414.03 h70
  text "D" at 5685.53,-2414.03 h70
  text ".Company_Design_Group" at -2303.71,-2487.48 h70
  text "Board NO.:" at 2665.53,-2565.03 h45
  text "REV:" at 4765.53,-2565.03 h45
  text ".Company_Address_1" at 1410.53,-2585.03 h70
  text "The information in this document is subject to change without notice. The statements, configurations," at -3389.47,-2665.03 h45
  text ".Company_Address_2" at 1410.53,-2685.03 h70
  text ".Board_No" at 2665.53,-2685.03 h70
  text ".Board_Rev" at 4765.53,-2685.03 h70
  text "technical data and recommendations in this document are believed to be accurate and reliable, but are" at -3389.47,-2740.03 h45
  text ".Company_Address_3" at 1410.53,-2785.03 h70
  text "presented without express or implied warranty. The information in this document is the proprietary and" at -3389.47,-2815.03 h45
  text "Layer:" at 2665.53,-2865.03 h45
  text "DATE:" at 4765.53,-2865.03 h45
  text ".Company_Web_Site" at 1410.53,-2885.03 h70
  text "confidential property of Silicon Labs and is priviliged. No part of the drawing or information may" at -3389.47,-2890.03 h45
  text "be duplicated or otherwise used without the express permission of Silicon Labs." at -3389.47,-2965.03 h45
  text ".Company_Tel" at 1410.53,-2985.03 h70
  text ".Print_Date" at 4765.53,-2985.03 h70
  text "1" at -2512.13,-3200.03 h70
  text "2" at -154.12,-3200.03 h70
  text "3" at 2222.53,-3200.03 h70
  text "4" at 4597.88,-3200.03 h70
Drill Drawing:
  drawing of 206 lines, arcs and shapes, not listed
  text "Fabrication Notes:" at -3316.59,3769.75 h70
  text "1. All dimensions in inches. Tolerance = +/- 0.005 unless noted otherwise." at -3316.59,3669.75 h45
  text "2. All materials: laminates, resins, metallizations and soldermask to be compliant with RoHS and WEEE directives." at -3316.59,3594.75 h45
  text "3. Use 370 HR FR-4 or similar grade glass epoxy." at -3316.59,3519.75 h45
  text "4. Tg > 170 degrees C, glass transition temperature." at -3316.59,3446.5 h45
  text "5. TD > 350 degrees C, thermal decomposition." at -3316.59,3371.09 h45
  text "6. Minimum flammibility rating UL94V-0, maximum dissipation factor 0.025." at -3316.59,3292.25 h45
  text "7. Adjust prepreg for 0.032\", +/- 0.003\" finished thickness measured over soldermask." at -3316.59,3199.2 h45
  text "Layer" at 1799,3133.28 h45.9
  text "Name" at 2117.29,3133.28 h45.9
  text "Material" at 2833.25,3133.28 h45.9
  text "Thickness" at 3495.67,3133.28 h45.9
  text "Constant" at 3997.5,3133.28 h45.9
  text "Board Layer Stack" at 4438.14,3133.28 h45.9
  text "8. Copper thickness 0.0014\", (1 oz)." at -3316.59,3124.2 h45
  text "9. Hole size tolerance = +/- 0.003\" unless noted otherwise." at -3316.59,3049.2 h45
  text "Top Overlay" at 2117.29,3041.48 h45.9
  text "10. Hole centers and pad centers to be concentric within 0.002\"." at -3316.59,2974.2 h45
  text "Top Solder" at 2117.29,2949.68 h45.9
  text "Solder Resist" at 2833.25,2949.68 h45.9
  text "0.40mil" at 3495.67,2949.68 h45.9
  text "3.5" at 3997.5,2949.68 h45.9
  text "11. Drill chart dimensions are finished hole sizes." at -3316.59,2899.2 h45
  text "1" at 1799,2857.88 h45.9
  text "Top Layer" at 2117.29,2857.88 h45.9
  text "Copper" at 2833.25,2857.88 h45.9
  text "1.40mil" at 3495.67,2857.88 h45.9
  text "12. Finish - immersion gold over nickel.  No exposed bare copper permitted." at -3316.59,2824.2 h45
  text "Dielectric 1" at 2117.29,2766.08 h45.9
  text "FR-4" at 2833.25,2766.08 h45.9
  text "28.00mil" at 3495.67,2766.08 h45.9
  text "4.48" at 3997.5,2766.08 h45.9
  text "13. Solder mask over bare copper, LPI clas 2 gen. industrial registration +/- 0.004." at -3316.59,2741.91 h45
  text "2" at 1799,2674.28 h45.9
  text "Bottom Layer" at 2117.29,2674.28 h45.9
  text "Copper" at 2833.25,2674.28 h45.9
  text "1.40mil" at 3495.67,2674.28 h45.9
  text "14. No coverage on solder pads permitted." at -3316.59,2666.91 h45
  text "15. Refer to soldermask gerbers for tenting of vias." at -3316.59,2591.91 h45
  text "Bottom Solder" at 2117.29,2582.48 h45.9
  text "Solder Resist" at 2833.25,2582.48 h45.9
  text "0.40mil" at 3495.67,2582.48 h45.9
  text "3.5" at 3997.5,2582.48 h45.9
  text "16. White silkscreen legend over red soldermask - both sides." at -3316.59,2516.91 h45
  text "Bottom Overlay" at 2117.29,2490.68 h45.9
  text "17. Manufacturer icons not permitted on the silkscreen top layer." at -3316.59,2441.91 h45
  text "Total board thickness:" at 1799,2398.88 h45.9
  text "31.60mil" at 3495.67,2398.88 h45.9
  text "18. PCB serialization/panel placement ID on silkscreen bottom." at -3316.59,2366.91 h45
  text "19. Full electrical test against IPC-356A netlist." at -3316.59,2291.91 h45
  text "Symbol" at 1202.01,2139.98 h57.92
  text "Count" at 1615.21,2139.98 h57.92
  text "Hole Size" at 2101.66,2139.98 h57.92
  text "Plated" at 2688.57,2139.98 h57.92
  text "Hole Type" at 3101.77,2139.98 h57.92
  text "Drill Layer Pair" at 3698.33,2139.98 h57.92
  text "Pad Shape" at 4908.54,2139.98 h57.92
  text "643" at 1615.21,2019.32 h48.27
  text "0.250mm" at 2101.66,2019.32 h48.27
  text "PTH" at 2688.57,2019.32 h48.27
  text "Round" at 3101.77,2019.32 h48.27
  text "Top Layer - Bottom Layer" at 3698.33,2019.32 h48.27
  text "Rounded" at 4908.54,2019.32 h48.27
  text "643 Total" at 1615.21,1898.65 h48.27
  text ".Layer_Name" at 3043.28,-2960.76 h60

## Dimensions
72.21,1168.47 to 1414,1168.47 on Drill Drawing
1414,1168.47 to 1414,3.22 on Drill Drawing

## Text inside footprints (layer, text, board x,y; h text height)
Designator4: Top M1 Top Assembly/M2 Bottom Assembly "LOW COST REFERENCE DESIGN (2 LAYER)" at 84.51,969.43 h10; Top M1 Top Assembly/M2 Bottom Assembly "R" at 396.66,1118.96 h25; Top M1 Top Assembly/M2 Bottom Assembly "EFR32xG22_LC_REF_DES" at 84.51,992.07 h10; Top M1 Top Assembly/M2 Bottom Assembly "REV. A01" at 268.53,992.07 h10